# Altium PCB senkron_buck.PcbDoc (part 3 of 3)
Units mm, origin at the board's own origin, x right, y up, seen from the top; angles counter-clockwise.
Board outline 100 x 70 mm, 4 copper layers (Top Layer, L2_GND, L3_PWR, Bottom Layer), stack 1.586 mm thick; 52 components, 27 nets, 143 pads, 815 vias.
Unrouted connection lines stored in the file: 34.
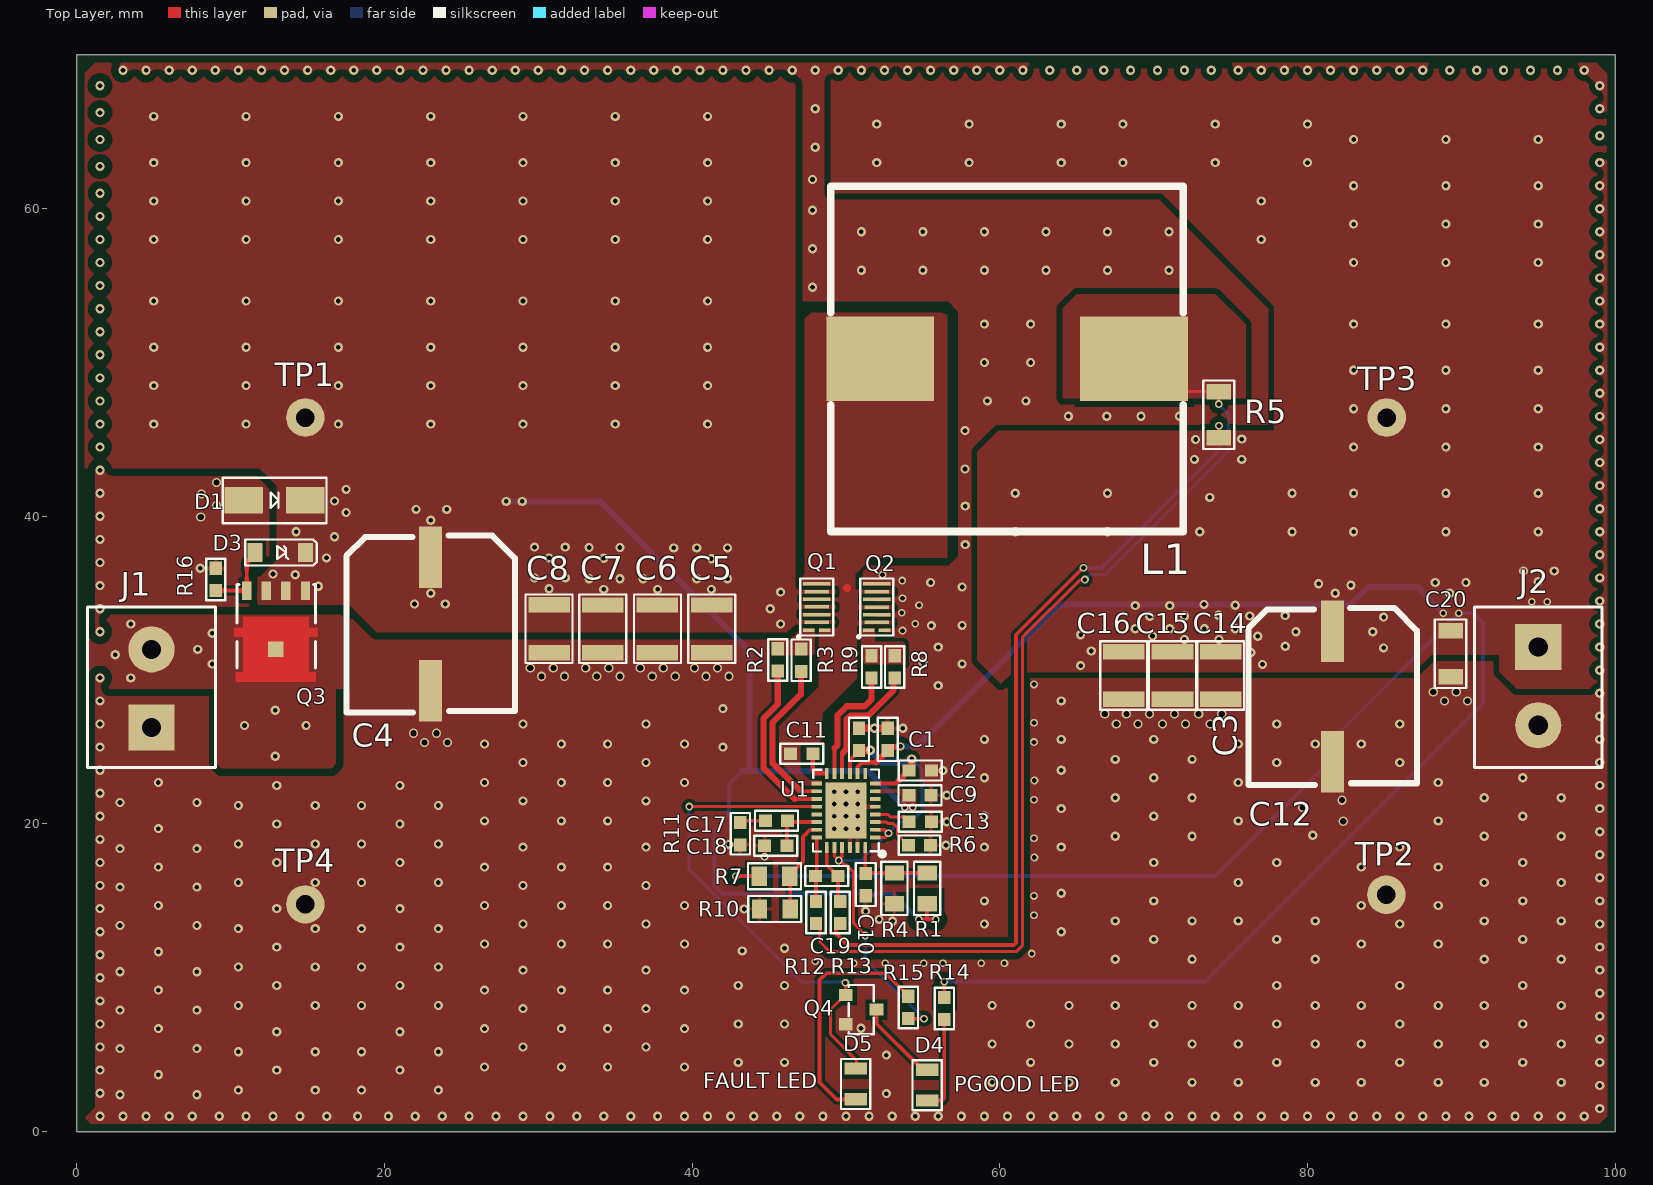
[diagram p0: Top Layer view]

## Via types
v1: diameter 0.6, hole 0.3, Top Layer to Bottom Layer, tented both sides, 715 vias
v2: diameter 0.5, hole 0.3, Top Layer to Bottom Layer, tented both sides, 46 vias
v3: diameter 0.6, hole 0.4, Top Layer to Bottom Layer, tented both sides, 42 vias
v4: diameter 0.5, hole 0.3, Top Layer to Bottom Layer, tented bottom, 12 vias

## Nets (pads, with @x,y where several pads share a name; then routed paths per layer and width w, separated by ;. In a path a pad name is that pad's centre, name@x,y a point inside that pad or via, vN(x,y) a via of type N, cw(c..) or ccw(c..) an arc to the next point about the centre after c; other vN are vias at no path point) (continued)
GND: (continued)
  other v1: 1.5,1 3,1 4.5,1 6,1 7.5,1 9.25,1 11,1 12.75,1 14.5,1 16.25,1 18.25,1 20.25,1 22,1 23.75,1 25.5,1 27.25,1 29,1 30.75,1 32.5,1 34.25,1 36,1 37.75,1 39.5,1 41,1 42.5,1 44,1 45.5,1 47,1 48.5,1 50,1 51.5,1 53,1 54.5,1 56,1 57.5,1 59,1 60.5,1 62,1 63.5,1 65,1 66.5,1 68,1 69.5,1 71,1 72.5,1 74,1 75.5,1 77,1 78.5,1 80,1 81.5,1 83,1 84.5,1 86,1 87.5,1 89,1 90.5,1 92,1 93.5,1 95,1 96.5,1 98,1 99,1.5 2.8,2.4 7.8,2.4 52.625,2.475 1.5,2.5 10.5,2.7 15.5,2.7 18.5,2.7 23.5,2.7 99,3 59.5,3.2 64.5,3.2 67.5,3.2 72.5,3.2 75.5,3.2 80.5,3.2 83.5,3.2 88.5,3.2 91.5,3.2 96.5,3.2 5.3,3.7 1.5,4 13,4 21,4 26.5,4.2 31.5,4.2 34.5,4.2 39.5,4.2 43,4.5 46,4.5 62,4.5 70,4.5 78,4.5 86,4.5 94,4.5 99,4.5 52.625,4.975 10.5,5.2 15.5,5.2 18.5,5.2 23.5,5.2 2.8,5.4 7.8,5.4 1.5,5.5 29,5.5 37,5.5 59.5,5.7 64.5,5.7 67.5,5.7 72.5,5.7 75.5,5.7 80.5,5.7 83.5,5.7 88.5,5.7 91.5,5.7 96.5,5.7 99,6 13,6.5 21,6.5 5.3,6.7 26.5,6.7 31.5,6.7 34.5,6.7 39.5,6.7 50.975,6.725 1.5,7 43,7 46,7 62,7 70,7 78,7 86,7 94,7 99,7.5 2.8,7.9 7.8,7.9 29,8 37,8 10.5,8.2 15.5,8.2 18.5,8.2 23.5,8.2 59.5,8.2 64.5,8.2 67.5,8.2 72.5,8.2 75.5,8.2 80.5,8.2 83.5,8.2 88.5,8.2 91.5,8.2 96.5,8.2 1.5,8.5 99,9 5.3,9.2 26.5,9.2 31.5,9.2 34.5,9.2 39.5,9.2 13,9.5 21,9.5 43,9.5 46,9.5 78,9.5 86,9.5 94,9.5 1.5,10 2.8,10.4 7.8,10.4 29,10.5 37,10.5 99,10.5 10.5,10.7 15.5,10.7 18.5,10.7 23.5,10.7 67.5,11.2 72.5,11.2 80.5,11.2 91.5,11.2 96.5,11.2 1.5,11.5 5.3,11.7 43.25,11.75 46,11.925 13,12 21,12 99,12 26.5,12.2 31.5,12.2 34.5,12.2 39.5,12.2 83.5,12.2 88.5,12.2 70,12.5 78,12.5 94,12.5 1.5,13 64,13 10.5,13.2 15.5,13.2 18.5,13.2 23.5,13.2 2.8,13.4 7.8,13.4 29,13.5 37,13.5 59,13.5 86,13.5 99,13.5 53.025,13.675 67.5,13.7 72.5,13.7 75.5,13.7 80.5,13.7 91.5,13.7 96.5,13.7 52.15,13.8 51.275,14.325 43.375,14.475 1.5,14.5 13,14.5 21,14.5 5.3,14.7 26.5,14.7 31.5,14.7 34.5,14.7 39.5,14.7 83.5,14.7 88.5,14.7 59,15 70,15 94,15 99,15 64,15.5 2.8,15.9 7.8,15.9 1.5,16 29,16 37,16 10.5,16.2 15.5,16.2 18.5,16.2 23.5,16.2 75.5,16.2 91.5,16.2 96.5,16.2 99,16.5 5.3,17.2 26.5,17.2 31.5,17.2 34.5,17.2 83.5,17.2 88.5,17.2 1.5,17.5 13,17.5 21,17.5 70,17.5 78,17.5 94,17.5 99,18 2.8,18.4 7.8,18.4 29,18.5 37,18.5 59,18.5 64,18.5 86,18.5 56.5,18.625 42.378,18.675 10.5,18.7 15.5,18.7 18.5,18.7 23.5,18.7 1.5,19 67.5,19.2 72.5,19.2 91.5,19.2 96.5,19.2 80.35,19.275 99,19.5 5.3,19.7 13,20 21,20 56.55,20.15 26.5,20.2 31.5,20.2 34.5,20.2 75.5,20.2 88.5,20.2 1.5,20.5 59,20.5 70,20.5 94,20.5 64,21 99,21 10.5,21.2 15.5,21.2 18.5,21.2 23.5,21.2 2.8,21.4 7.8,21.4 29,21.5 37,21.5 67.5,21.7 72.5,21.7 91.5,21.7 96.5,21.7 56.55,21.875 1.5,22 13,22.5 21,22.5 99,22.5 5.3,22.7 26.5,22.7 31.5,22.7 34.5,22.7 39.5,22.7 75.5,22.7 88.5,22.7 59,23 70,23 94,23 56.3,23.475 1.5,23.5 64,23.5 29,24 37,24 78,24 86,24 99,24 67.5,24.2 72.5,24.2 1.5,25 42,25 26.5,25.2 31.5,25.2 34.5,25.2 39.5,25.2 75.5,25.2 80.5,25.2 83.5,25.2 59,25.5 64,25.5 70,25.5 99,25.5 51.85,26.225 53.7,26.225 1.5,26.5 29,26.5 37,26.5 78,26.5 86,26.5 99,27 42,27.5 1.5,28 64,28 99,28.5 56,29 1.5,29.5 99,30 57.545,30.409 55,30.5 56,31.5 99,31.5 1.5,32.5 55.55,32.9 57.545,32.909 99,33 1.5,34 99,34.5 57.545,35.409 1.5,35.5 55.5,35.7 99,36 8.025,36.625 1.5,37 99,37.5 57.746,38.165 1.5,38.5 99,39 1.5,40 99,40.5 57.746,40.665 1.5,41.5 99,42 1.5,43 57.733,43.077 99,43.5 1.5,44.5 99,45 57.733,45.577 1.5,46 64.457,46.513 66.957,46.513 69.177,46.513 71.677,46.513 99,46.5 1.5,47.5 59.193,47.506 61.693,47.506 99,48 1.5,49 99,49.5 59,50 62,50 1.5,50.5 99,51 1.5,52 59,52.5 62,52.5 99,52.5 1.5,53.5 99,54 47.825,54.9 1.5,55 99,55.5 51,56 55,56 59,56 63,56 67,56 71,56 1.5,56.5 99,57 47.825,57.4 1.5,58 51,58.5 55,58.5 59,58.5 63,58.5 67,58.5 71,58.5 99,58.5 1.5,59.5 47.825,59.9 99,60 1.5,61 99,61.5 47.825,61.9 1.5,62.75 99,63 48,64 1.5,64.5 99,64.75 1.5,66.25 48,66.5 99,66.5 1.5,68 99,68 3,69 4.5,69 6,69 7.5,69 9,69 10.5,69 12,69 13.5,69 15,69 16.5,69 18,69 19.5,69 21,69 22.5,69 24,69 25.5,69 27,69 28.5,69 30,69 31.5,69 33,69 34.5,69 36,69 37.5,69 39,69 40.5,69 42,69 43.5,69 45,69 46.5,69 48,69 49.5,69 51,69 52.5,69 54,69 55.5,69 57,69 58.5,69 60,69 61.5,69 63.25,69 65,69 66.75,69 68.5,69 70.25,69 72,69 73.75,69 75.5,69 77,69 78.5,69 80,69 81.5,69 83,69 84.5,69 86,69 87.5,69 89.25,69 91,69 92.75,69 94.5,69 96.25,69 98,69
  other v2: 50.5,10.954 52.55,10.95 55.05,10.95 56.3,10.95 58.8,10.95 60.3,10.95 48,11.075 62.075,11.575 62.225,14.075 62.225,15.325 62.25,17.825 44.7,17.875 62.225,19.075 62.225,21.575 62.25,22.825 62.225,25.325 62.225,26.575 62.225,29.075 53.675,32.575 54.5,33.025 53.625,33.725 54.75,34.225 53.675,34.675 53.65,35.825 52.375,36.2
  other v3: 82.325,20.175 79.675,21.075 82.25,21.55 22.6,25.3 24.1,25.3 21.875,25.9 23.375,25.9 67.575,26.5 68.975,26.5 70.575,26.5 72.075,26.5 73.675,26.5 66.825,27.15 68.225,27.15 69.725,27.15 71.35,27.15 72.925,27.15 74.425,27.15 88.9,28 90.4,28 88.175,28.575 89.675,28.575 30.2,29.6 31.7,29.6 33.8,29.6 35.3,29.6 37.4,29.6 38.9,29.6 40.9,29.6 42.4,29.6 29.475,30.15 30.975,30.15 33.075,30.15 34.575,30.15 36.625,30.15 38.125,30.15 40.15,30.15 41.65,30.15 8.05,39.95 9.075,40.7 8.1,41.45 9.075,42.2
  other v4: 49.238,19.7 50,19.7 50.762,19.7 49.238,20.5 50,20.5 50.762,20.5 49.238,21.3 50,21.3 50.762,21.3 49.238,22.1 50,22.1 50.762,22.1
INTVCC: C2.2 C3.2 R15.2 U1.1 U1.2 U1.8 U1.11 U1.24 U1.25 | length 37
  Top Layer w0.2: U1.24 49.25,17.908 v2(49.53,17.628) ; U1.25 49.75,17.904 49.53,17.684 v2(49.53,17.628) ; v2(51.251,12.754) 51.251,12.782 50.495,13.538 50.495,16.854 50.024,17.325 49.914,17.325 49.611,17.628 v2(49.53,17.628) ; U1.2 52.525,19.625 v2(52.761,19.389) ; U1.1 52.554,19.126 v2@52.818,19.389 ; R15.2 54.063,7.341 v2(55.067,7.341)
  Top Layer w0.25: U1.11 50.25,24.151 50.851,24.752 C3.2 ; U1.8 53.225,22.625 53.425,22.825
  Top Layer w0.4: 53.425,22.825 54.085,23.485 C2.2@54.09,23.485
  Top Layer w0.5: C3.2 50.858,24.784 51.581,24.784 v1(51.587,24.79) ; C2.2@54.09,23.485 54.121,23.485 54.261,23.625 54.261,24.212 v1(54.28,24.232)
  Bottom Layer w0.2: v2(49.53,17.628) 51,17.628 v2(52.761,19.389) 53.511,20.139 54.242,20.139 54.935,20.832 54.935,23.577 v1(54.28,24.232) ; v2(51.251,12.754) 51.251,11.157 v2(55.067,7.341)
  Bottom Layer w0.5: v1(51.587,24.79) 52.367,24.011 53.88,24.011 54.081,24.212 54.261,24.212 v1(54.28,24.232)
NetC10_2: C10.2 R1.1 R4.2 U1.28 | length 5.7
  Top Layer w0.25: U1.28 51.25,16.811 C10.2 51.3,16.811 R4.2 R1.1
NetC11_1: C11.1 U1.14 | length 2
  Top Layer w0.3: C11.1 47.842,23.507 48.049,23.3 U1.14@48.684,23.3
NetC11_2: C11.2 L1.1 Q1.2 Q1.4 Q1.6 Q1.8 Q2.3 Q2.5 Q2.7 U1.15 | length 0
  Top Layer w0.5: 50.063,35.331 50.089,35.357
NetC13_2: C13.2 U1.4 | length 2.4
  Top Layer w0.2: U1.4 52.711,20.625 52.889,20.447 53.8,20.447 C13.2
NetC17_1: C17.1 R11.2 | length 1.7
  Top Layer w0.25: R11.2 43.258,20.213 C17.1
NetC17_2: C17.2 C18.2 U1.20 | length 3.6
  Top Layer w0.25: C18.2 46.158,20.163 C17.2 46.296,20.125 U1.20
NetC19_1: C19.1 R13.1 U1.23 | length 3.9
  Top Layer w0.25: U1.23 48.75,17.325 49.45,16.625 C19.1 49.475,15.125 R13.1
NetC19_2: C19.2 R12.1 U1.22 | length 4.2
  Top Layer w0.25: R12.1 48.05,16.6 C19.2 48.1,16.7 U1.22
NetD3_A: D3.A Q3.G R16.2 | length 4.7
  Top Layer w0.254: R16.2 Q3.G 11.045,36.997
  Top Layer w0.381: 11.045,36.997 11.573,37.525 D3.A
NetD4_1: D4.1 R14.1 | length 6.3
  Top Layer w0.25: D4.1 56.245,2.025 56.391,2.171 R14.1
NetD4_2: D4.2 Q4.D | length 5.5
  Top Layer w0.25: Q4.D 51.987,7.013 54.675,4.325 54.675,4.3 54.95,4.025 D4.2
NetD5_1: D5.1 R15.1 | length 16
  Top Layer w0.25: D5.1 49.4,2.1 48.285,3.215 48.285,9.861 48.724,10.3 52.553,10.3 53.751,9.102 53.776,9.102 54.051,8.827 R15.1
NetL1_2: L1.2 R5.1 R12.2 | length 63.9
  Top Layer w0.2: R12.2 48.311,13.264 48.311,12.328 48.934,11.704 50.811,11.704 50.815,11.7 61.073,11.7 61.468,12.095 61.468,32.131 65.191,35.854 65.495,35.854 v2(65.532,35.89) ; L1.2 70.86,48.109 R5.1 74.225,48.09 v2(74.225,47.3)
  Bottom Layer w0.2: v2(65.532,35.89) 65.862,36.22 66.853,36.22 74.846,44.214 74.846,45.438 74.854,45.446 74.854,46.671 v2(74.225,47.3)
NetQ1_1: Q1.1 R2.2 R3.2
NetQ2_1: Q2.1 R8.2 R9.2
NetR2_1: R2.1 U1.17 | length 10.9
  Top Layer w0.25: 46.676,21.625 U1.17@48.099,21.625
  Top Layer w0.4: R2.1@45.561,29.916 45.561,27.781 44.628,26.848 44.628,23.673 46.676,21.625
NetR3_1: R3.1 U1.16 | length 10.4
  Top Layer w0.25: 46.95,22.213 47.038,22.125 U1.16
  Top Layer w0.3: R3.1@47.066,29.896 R3.1
  Top Layer w0.4: 46.95,22.213 45.228,23.935 45.228,26.599 47.066,28.438 R3.1@47.066,29.896
NetR6_2: R6.2 U1.3 | length 3
  Top Layer w0.2: U1.3 52.645,20.125 52.745,20.025 53.076,20.025 53.365,19.736 53.365,19.281 54.025,18.622 R6.2
NetR7_1: R7.1 R10.2 U1.21 | length 6.1
  Top Layer w0.25: R10.2 46.375,16.575 R7.1 46.35,16.725 47.195,17.57 47.195,19.155 47.665,19.625 U1.21
NetR8_1: R8.1 U1.12 | length 8.3
  Top Layer w0.25: U1.12 49.75,24.576 49.798,24.624
  Top Layer w0.4: 49.798,24.624 50.051,24.877 50.051,26.817 50.285,27.052 51.452,27.052 53.095,28.695 53.095,29.419 R8.1
NetR9_1: R9.1 U1.13 | length 7.9
  Top Layer w0.25: U1.13 49.25,24.925
  Top Layer w0.4: 49.25,24.925 49.451,25.125 49.451,27.066 50.037,27.652 51.203,27.652 51.662,28.111 R9.1
PGOOD: D5.2 Q4.G U1.18 | length 32.3
  Top Layer w0.2: v2(39.802,21.133) 39.81,21.125 U1.18 ; v2(49.962,9.671) 49.962,8.91 48.997,7.944 48.997,6.325 50.673,4.648 D5.2@50.673,4.1
  Bottom Layer w0.2: v2(39.802,21.133) 39.802,17.052 47.126,9.728 49.905,9.728 v2(49.962,9.671)
VBAT: J1.2 Q3.D
  other v1: 12.9,24.4 10.9,26.4 14.9,26.4 12.9,27.4 3.5,29.5 8.8,30.4 2.5,31 7.85,31.35 8.8,32.4 3.5,33
VIN: C4.1 C5.2 C6.2 C7.2 C8.2 C9.2 D1.K D3.K Q1.3 Q1.5 Q1.7 Q3.S R1.2 TP1.1 U1.7 | length 65.3
  Top Layer w0.25: v2(54.737,13.792) 55.258,13.792 ; R1.2 55.258,14.794 55.258,13.792 ; v2(55.829,13.792) 55.258,13.792
  Bottom Layer w0.25: 43.256,23.444 42.4,22.588 42.4,20.6 41.453,19.653 41.453,16.002 41.98,15.475 53.054,15.475 v2(54.737,13.792) v2(55.829,13.792)
  Bottom Layer w0.4: v1(27.915,40.97) 34.005,40.97 43.725,31.25 43.725,23.444 ; 43.256,23.444 43.725,23.444 ; v2(54.331,21.082) v2(53.823,21.082) 51.46,23.444 43.725,23.444
  other v1: 45.75,33 45.075,34 21.95,34.3 23.95,34.3 23,35 45.75,35.075 34.25,35.25 37.75,35.25 41.25,35.25 30.7,35.3 15.7,35.45 33.3,35.95 35.3,35.95 36.8,35.95 40.3,35.95 42.3,35.95 29.75,36 31.75,36 14.2,36.2 12.75,36.25 41.25,37.25 34.25,37.275 16.225,37.3 30.7,37.3 38.8,37.95 40.3,37.95 42.3,37.95 33.3,37.975 35.3,37.975 29.75,38 31.75,38 16.75,38.675 14.25,39 23,39.75 17.5,40.25 22.05,40.45 24.05,40.45 28.956,40.97 16.75,41 17.5,41.75 5,46 11,46 17,46 23,46 29,46 35,46 41,46 5,48.5 11,48.5 17,48.5 23,48.5 29,48.5 35,48.5 41,48.5 5,51 11,51 17,51 23,51 29,51 35,51 41,51 5,54 11,54 17,54 23,54 29,54 35,54 41,54 5,58 11,58 17,58 23,58 29,58 35,58 41,58 5,60.5 11,60.5 17,60.5 23,60.5 29,60.5 35,60.5 41,60.5 5,63 11,63 17,63 23,63 29,63 35,63 41,63 5,66 11,66 17,66 23,66 29,66 35,66 41,66
VOUT: C1.2 C12.1 C14.2 C15.2 C16.2 C20.2 J2.1 R5.2 R7.2 R13.2 R14.2 TP3.1 U1.10 | length 204.5
  Top Layer w0.25: v2(42.824,16.612) 44.338,16.612 R7.2 ; R13.2 49.359,13.259 49.359,12.871 50.101,12.129 50.987,12.129 50.991,12.125 60.893,12.125 61.043,12.275 61.043,32.307 65.39,36.654 v2(65.441,36.654) ; U1.10 50.75,23.71 51.042,24.002 51.043,24.002 ; C1.2@52.705,24.752 C1.2 ; v2(56.388,9.754) 56.388,8.736 R14.2 ; R5.2 74.25,45.115 v2(74.25,45.9)
  Top Layer w0.3: 51.043,24.002 51.396,24.002 51.397,24.003 51.956,24.003
  Top Layer w0.4: 51.956,24.003 C1.2@52.705,24.752 ; C1.2 52.705,24.802 52.905,25.002 53.473,25.002 53.516,25.044 v2(53.543,25.044)
  Bottom Layer w0.25: v2(42.824,16.612) 73.99,16.612 82.131,24.752 82.131,25.997 v2(89.84,33.706) 90.769,33.706 91.415,33.06 91.415,27.815 73.354,9.754 v2(56.388,9.754) ; v2(65.441,36.654) 66.61,36.654 74.25,44.294 v2(74.25,45.9)
  Bottom Layer w0.4: v2(53.543,25.044) 54.644,25.044 63.875,34.275 82.826,34.275 83.958,35.408 87.122,35.408 v2(88.824,33.706)
  other v1: 65.25,30.3 77.075,30.375 76.325,31.15 65.95,31.25 84.95,31.45 78.55,31.55 72,32 74.25,32 76.775,32.2 69.925,32.225 65.25,32.3 79.25,32.5 84.25,32.5 68.8,32.7 71.05,32.7 73.3,32.7 75.3,32.7 84.95,33.45 69.75,33.5 72,33.5 76.25,33.525 78.55,33.55 74.225,33.575 68.8,34.2 71.05,34.2 75.3,34.225 73.275,34.275 81.8,35 89.25,35 82.825,35.525 80.725,35.625 88.3,35.7 90.3,35.7 95,35.75 94.05,36.45 96.05,36.45 61,39 67,39 73,39 79,39 83,39 89,39 95,39 73.652,41.23 61,41.5 67,41.5 79,41.5 83,41.5 89,41.5 95,41.5 72.65,43.7 75.725,43.7 83,44.5 89,44.5 95,44.5 72.725,45 75.725,45.025 83,47 89,47 95,47 83,49.5 89,49.5 95,49.5 83,52.5 89,52.5 95,52.5 83,56.5 89,56.5 95,56.5 77,58 83,59 89,59 95,59 77,60.5 83,61.5 89,61.5 95,61.5 52,63 58,63 64,63 68,63 74,63 80,63 83,64.5 89,64.5 95,64.5 52,65.5 58,65.5 64,65.5 68,65.5 74,65.5 80,65.5
  other v2: 94.574,34.456 95.59,34.456
pads on no net: U1.6 U1.9 U1.19

## Polygon pours and split planes (outlines as drawn)
NetL1_2 on Top Layer "NETL1_2_L01_P042" (solid, pour order 42): 65.028,54.459 74.019,54.433 75.975,52.478 75.975,47.675 64.088,47.675 64.088,53.519
VOUT on Top Layer "VOUT_L01_P049" (solid, remove dead copper, pour order 49): 49,61 70.521,61 77.851,53.67 77.851,45.55 59.901,45.55 58.547,44.196 58.547,30.632 60.071,29.108 60.833,29.87 86.919,29.87 88.087,30.988 88.29,30.988 92.481,30.988 92.481,29.896 93.599,28.778 99.441,28.778 99.441,66.904 97.18,69.164 97.13,69.113 49,69.113
VIN on Top Layer "VIN_L01_P043" (solid, remove dead copper, pour order 43): 11.735,34.239 46.685,34.239 46.685,68.097 45.288,69.494 1.194,69.494 0.508,68.809 0.508,43.129 11.862,43.129 13.005,41.986 13.005,37.16 11.913,36.068 11.76,36.068
GND on Top Layer "GND_L01_P060" (solid, remove dead copper, pour order 60): 98.781,69.494 99.492,68.783 99.492,1.016 98.984,0.508 0.914,0.508 0.508,0.914 1.194,1.6 1.194,69.494 1.194,1.6 1.194,69.494
VBAT on Top Layer "VBAT_L01_P051" (solid, pour order 51): 9.093,28.804 9.093,23.927 9.398,23.622 16.561,23.622 16.84,23.901 16.84,28.804
VBAT on Top Layer "VBAT_L01_P050" (solid, remove dead copper, pour order 50): 0.635,28.804 17.272,28.804 17.272,33.452 17.12,33.604 0.813,33.604 0.635,33.782
NetC11_2 on Top Layer "NETC11_2_L01_P059" (solid, pour order 59): 47.32,36.03 47.32,52.832 47.904,53.416 56.236,53.238 56.591,53.111 56.591,37.313 51.676,37.313 50.615,36.251
VIN on Top Layer "VIN_L01_P048" (solid, pour order 48): 51.537,22 53.387,22 53.581,21.807 53.581,20.968 53.721,20.828 54.458,20.828 54.574,20.944 54.574,22.248 51.537,22.248
VIN on Top Layer "VIN_L01_P046" (solid, pour order 46): 44.844,32.473 19.495,32.473 17.653,34.315 44.628,34.315
VIN on Top Layer "VIN_L01_P045" (solid, pour order 45): 46.24,32.473 44.749,32.473 44.628,32.594 44.628,34.315 45.263,34.315 46.159,35.211
NetC11_2 on Top Layer "NETC11_2_L01_P058" (solid, pour order 58): 48.219,32.41 48.219,28.915 45.669,26.365 45.669,25.16 46.927,25.16 47.041,25.273 48.209,25.273 48.463,25.527 48.463,27.203 50.699,29.439 50.699,32.41
NetQ2_1 on Top Layer "NETQ2_1_L01_P057" (solid, pour order 57): 51.105,32.715 51.867,32.715 51.867,31.852 53.721,31.852 53.848,31.725 53.848,30.378 51.257,30.378 51.003,30.632 51.003,32.639
NetQ1_1 on Top Layer "NETQ1_1_L01_P056" (solid, pour order 56): 45.136,30.963 47.854,30.963 47.955,31.064 47.955,32.766 47.168,32.766 46.355,31.953 45.136,31.953
NetC11_2 on Top Layer "NETC11_2_L01_P055" (solid, pour order 55): 48.449,22.504 48.449,22.75 48.311,22.835 47.65,22.835 47.041,23.444 47.041,25.273 45.702,25.273 45.669,25.24 45.669,23.952 45.745,23.876 45.847,23.876 46.431,23.292 47.219,22.504
NetC11_2 on Top Layer "NETC11_2_L01_P053" (solid, pour order 53): 50.699,35.227 50.387,35.227 50.387,32.96 50.448,32.899 50.448,32.781 50.668,32.781 50.852,32.964 53.089,32.964 53.105,32.98 53.105,33.157 53.054,33.208 50.844,33.208 50.771,33.281 50.771,33.897 50.836,33.962 53.096,33.962 53.13,33.996 53.13,34.173 53.079,34.224 50.844,34.224 50.771,34.297 50.771,34.63 50.771,34.888 50.846,34.963 53.081,34.963 53.13,35.012 53.13,35.189 53.093,35.227
NetC11_2 on Top Layer "NETC11_2_L01_P052" (solid, pour order 52): 50.615,32.725 50.615,36.251 47.331,36.251 47.137,36.017 47.137,35.494 49.444,35.494 49.555,35.382 49.555,34.798 49.482,34.724 47.092,34.724 47.092,34.519 47.116,34.494 49.376,34.494 49.555,34.315 49.555,33.807 49.474,33.726 47.137,33.726 47.117,33.706 47.117,33.493 49.388,33.493 49.505,33.376 49.505,32.817 49.413,32.725 48.194,32.725 48.184,32.715 48.184,32.436 48.209,32.41 50.301,32.41
NetC11_2 on Top Layer "NETC11_2_L01_P054" (solid, pour order 54): 50.699,32.978 50.699,32.41 50.195,32.41 50.158,32.447 50.285,32.574 50.313,32.985
VIN on Top Layer "VIN_L01_P044" (solid, remove dead copper, pour order 44): 47.014,34.24 46.812,34.442 46.812,34.823 46.969,34.98 49.322,34.98 49.322,35.239 46.863,35.239 46.695,35.408 46.219,35.408 46.051,35.239 46.149,32.473 46.745,32.978 49.322,32.978 49.322,33.243 46.919,33.243 46.761,33.401 46.761,33.858 46.882,33.979 49.322,33.979 49.322,34.24
GND on Bottom Layer "GND_L04_P061" (solid, remove dead copper, pour order 61): 98.781,69.494 99.492,68.783 99.492,1.016 98.984,0.508 0.914,0.508 0.508,0.914 1.194,1.6 1.194,69.494 1.194,1.6 1.194,69.494
VOUT on L3_PWR (split plane): 42.873,16.729 42.914,16.701 42.942,16.66 42.951,16.612 42.942,16.563 42.914,16.522 42.873,16.494 42.824,16.485 42.776,16.494 42.735,16.522 42.707,16.563 42.698,16.612 42.707,16.66 42.735,16.701 42.776,16.729 42.824,16.738
VOUT on L3_PWR (split plane): 99.49,0.51 0.51,0.51 0.51,69.49 99.49,69.49
VBAT on L3_PWR (split plane): 16.048,32.096 16.048,22.804 15.646,22.402 10.154,22.402 9.627,22.929 9.627,27.975 9.619,28.04 9.593,28.101 9.553,28.153 9.053,28.653 9.001,28.693 8.94,28.719 8.875,28.727 1.604,28.727 1.302,29.029 1.302,33.021 1.904,33.623 14.521,33.623
VIN on L3_PWR (split plane): 45.023,66.121 45.023,37.85 45.031,37.785 45.057,37.724 45.097,37.672 47.198,35.571 47.198,32.879 46.171,31.852 16.552,31.852 16.552,32.2 16.544,32.265 16.518,32.326 16.478,32.378 14.803,34.053 14.751,34.093 14.69,34.119 14.625,34.127 2.052,34.127 2.052,66.421 3.479,67.848 43.296,67.848
GND on L3_PWR (split plane): 51.673,22.246 51.673,18.954 51.296,18.577 48.429,18.577 48.102,18.904 48.102,22.246 48.679,22.823 51.096,22.823
VOUT on L3_PWR (split plane): 53.592,25.162 53.633,25.134 53.66,25.093 53.67,25.044 53.66,24.996 53.633,24.955 53.592,24.927 53.543,24.918 53.495,24.927 53.454,24.955 53.426,24.996 53.416,25.044 53.426,25.093 53.454,25.134 53.495,25.162 53.543,25.171
no net on L3_PWR (split plane): 65.649,36.401 65.138,36.401 65.101,36.438 65.101,36.787 65.313,36.999 65.649,36.999
no net on L3_PWR (split plane): 74.723,46.148 74.723,45.914 74.723,45.602 74.491,45.37 73.909,45.37 73.652,45.627 73.652,46.16 73.884,46.392 74.479,46.392
GND on L2_GND (split plane): 99.49,0.51 0.51,0.51 0.51,69.49 99.49,69.49

## Other copper
Top Layer:
  pour cut-out: 51.105,35.499 51.105,36.375 50.874,36.144 50.874,35.486
  pour cut-out: 47.193,53.975 56.642,53.975 57.302,53.315 57.302,37.414 56.642,36.754 56.591,36.805 51.486,36.805 51.755,37.073 56.69,37.073 56.69,53.351 56.386,53.655 55.969,53.239 47.195,53.239
L3_PWR (plane layer: these items are gaps in the copper):
  circle w0.5: c53.543,25.044 r0.377
  circle w0.5: c42.824,16.612 r0.377
  lines w0.3: 64.95,36.375 64.95,36.85 65.25,37.15 65.8,37.15 65.8,36.3 65.75,36.25 65.45,36.25 65.075,36.25 64.95,36.375
  lines w0.4: 73.45,45.544 73.45,46.244 73.8,46.594 74.563,46.594 74.925,46.231 74.925,45.914 74.925,45.519 74.575,45.169 73.825,45.169 73.45,45.544
  lines w0.5: 16.3,31.575 16.325,31.6 46.275,31.6 47.45,32.775 47.45,35.675 45.275,37.85 45.275,66.225 43.4,68.1 3.375,68.1 1.8,66.525 1.8,33.875 ; 1.8,33.875 1.05,33.125 1.05,28.925 1.5,28.475 8.875,28.475 9.375,27.975 9.375,22.825 10.05,22.15 15.75,22.15 16.3,22.7 16.3,32.2 14.625,33.875 1.8,33.875 ; 47.85,18.8 47.85,22.35 48.575,23.075 51.2,23.075 51.925,22.35 51.925,18.85 51.4,18.325 48.325,18.325 47.85,18.8

## Silkscreen, mask and mechanical layers (free items; w line width, h text height)
Top Overlay:
  text "FAULT LED" at 40.707,2.825 h1
  text "PGOOD LED" at 57.032,2.6 h1